# EAGLE board CT_schematic (EAGLE 7.6.0)

Size 100 x 80 mm. Coordinates in mm from the lower left corner, seen from the top.
Outline: 0,0 100,0 100,80 0,80 0,0
Copper layers (1*16): Top 0.035mm / dielectric 1.5mm / Bottom 0.035mm
Design rules "default": minimum track width 10mil, minimum drill 24mil, track to track 8mil, track to pad 8mil, pad to pad 8mil, via to via 8mil, smd to smd 8mil, copper to edge 40mil, drill to drill 8mil, minimum pad ring 10mil, minimum via ring 8mil, stop-mask expansion 4mil, vias tented up to drill 0mil, thermal gap 10mil

## Footprints (pad centres in the part's own frame; a part is rotated, then mirrored left to right if it is on the bottom)
C0603 = smd 0.8 x 0.8: 1 -0.762,0; 2 0.762,0
C0805 = smd 1.2 x 1.3: 1 -1.016,0; 2 1.016,0
C0402 = smd 0.5 x 0.5: 1 -0.508,0; 2 0.508,0
C1210 = smd 1.2 x 2.5: 1 -1.524,0; 2 1.524,0
EXV-9H = smd 3.505 x 1.676: 1 -2.857,0; 2 2.857,0
L0603 = smd 0.8 x 0.8: 1 -0.762,0; 2 0.762,0
L1210 = smd 1.2 x 2.5: 1 -1.524,0; 2 1.524,0
PJ-037B_PACKAGE = drill 3.7 square: 1 12,0 | drill 3.2 square: 2 6,0
R0603 = smd 0.8 x 0.8: 1 -0.762,0; 2 0.762,0
UFQFPN28 = smd 0.559 x 0.305: 1 -2.07,1.5; 7 -2.07,-1.5; 15 2.07,-1.5; 21 2.07,1.5 | smd 0.813 x 0.305: 2 -1.943,1; 3 -1.943,0.5; 4 -1.943,0; 5 -1.943,-0.5; 6 -1.943,-1; 16 1.943,-1; 17 1.943,-0.5; 18 1.943,0; 19 1.943,0.5; 20 1.943,1 | smd 0.305 x 0.559: 8 -1.5,-2.07; 14 1.5,-2.07; 22 1.5,2.07; 28 -1.5,2.07 | smd 0.305 x 0.813: 9 -1,-1.943; 10 -0.5,-1.943; 11 0,-1.943; 12 0.5,-1.943; 13 1,-1.943; 23 1,1.943; 24 0.5,1.943; 25 0,1.943; 26 -0.5,1.943; 27 -1,1.943
SSOP-20 = smd 1.651 x 0.432: 1 -3.48,2.925; 2 -3.48,2.275; 3 -3.48,1.625; 4 -3.48,0.975; 5 -3.48,0.325; 6 -3.48,-0.325; 7 -3.48,-0.975; 8 -3.48,-1.625; 9 -3.48,-2.275; 10 -3.48,-2.925; 11 3.48,-2.925; 12 3.48,-2.275; 13 3.48,-1.625; 14 3.48,-0.975; 15 3.48,-0.325; 16 3.48,0.325; 17 3.48,0.975; 18 3.48,1.625; 19 3.48,2.275; 20 3.48,2.925
182-009-MALE = drill 1.194 pad 1.524 octagon: 1 -5.537,10.923; 2 -2.769,10.923; 3 0,10.923; 4 2.769,10.923; 5 5.537,10.923; 6 -4.153,8.08; 7 -1.384,8.08; 8 1.384,8.08; 9 4.153,8.08 | hole 3.048: -12.446,9.501; 12.446,9.501
SSOP-28 = smd 1.5 x 0.4: 1 -3.625,4.225; 2 -3.625,3.575; 3 -3.625,2.925; 4 -3.625,2.275; 5 -3.625,1.625; 6 -3.625,0.975; 7 -3.625,0.325; 8 -3.625,-0.325; 9 -3.625,-0.975; 10 -3.625,-1.625; 11 -3.625,-2.275; 12 -3.625,-2.925; 13 -3.625,-3.575; 14 -3.625,-4.225; 15 3.625,-4.225; 16 3.625,-3.575; 17 3.625,-2.925; 18 3.625,-2.275; 19 3.625,-1.625; 20 3.625,-0.975; 21 3.625,-0.325; 22 3.625,0.325; 23 3.625,0.975; 24 3.625,1.625; 25 3.625,2.275; 26 3.625,2.925; 27 3.625,3.575; 28 3.625,4.225
VQFN-16 = smd 1.105 x 0.381: 1 -1.822,0.975; 2 -1.822,0.325; 3 -1.822,-0.325; 4 -1.822,-0.975; 9 1.822,-0.975; 10 1.822,-0.325; 11 1.822,0.325; 12 1.822,0.975 | smd 0.381 x 1.105: 5 -0.975,-1.822; 6 -0.325,-1.822; 7 0.325,-1.822; 8 0.975,-1.822; 13 0.975,1.822; 14 0.325,1.822; 15 -0.325,1.822; 16 -0.975,1.822
HTSS-105-01-G-D = drill 1 pad 1.8 square: 1 0,0 | drill 1 pad 1.8: 2 0,2.54; 3 2.54,0; 4 2.54,2.54; 5 5.08,0; 6 5.08,2.54; 7 7.62,0; 8 7.62,2.54; 9 10.16,0; 10 10.16,2.54
ASFL1 = smd 1.7 x 1.5: 1 -1.27,-1.1; 2 1.27,-1.1; 3 1.27,1.1; 4 -1.27,1.1
WSON-8 = smd 0.3 x 0.6: 1 -0.75,0; 2 0.05,0; 3 0.85,0; 4 1.65,0; 5 1.65,3.8; 6 0.85,3.8; 7 0.05,3.8; 8 -0.75,3.8 | smd 3 x 2.6: PAD 0.45,1.9
SON-6 = smd 0.55 x 0.3: 1 -0.355,0.5 | smd 0.52 x 0.3: 2 -0.37,0; 3 -0.37,-0.5; 4 0.37,-0.5; 5 0.37,0; 6 0.37,0.5
SW_4-1437565-2 = smd 1.4 x 2.1: 1 -2.23,4.55; 2 -2.23,-4.55; 3 2.23,4.55; 4 2.23,-4.55
LGM67K-G1J2-24-Z = smd 0.8 x 1.4: A -2,0; C 0,0
NC7SZ125M5X = smd 1.3 x 0.7: 1 -1.3,0.95; 2 -1.3,0; 3 -1.3,-0.95; 4 1.3,-0.95; 5 1.3,0.95

## Placement (x,y rotation side)
C1  1e-07  [C0603]  -19.05,82.55 0 top  (outside the outline)
C2  1e-07  [C0603]  -22.86,82.55 0 top  (outside the outline)
C3  4.7e-06  [C0603]  -74.93,77.47 0 top  (outside the outline)
C4  1e-07  [C0603]  -26.67,82.55 0 top  (outside the outline)
C5  4.7e-06  [C0603]  -15.24,82.55 0 top  (outside the outline)
C6  1e-08  [C0603]  -30.48,82.55 0 top  (outside the outline)
C7  1e-08  [C0603]  -34.29,82.55 0 top  (outside the outline)
C8  1e-06  [C0603]  -38.1,82.55 0 top  (outside the outline)
C9  1e-06  [C0603]  -41.91,82.55 0 top  (outside the outline)
C10  1e-06  [C0603]  -45.72,82.55 0 top  (outside the outline)
C11  1e-06  [C0603]  -49.53,82.55 0 top  (outside the outline)
C12  4.7e-06  [C0805]  -76.2,69.85 0 top  (outside the outline)
C13  1e-07  [C0402]  -19.05,87.63 0 top  (outside the outline)
C14  1e-07  [C0402]  -22.86,87.63 0 top  (outside the outline)
C15  1e-07  [C0402]  -26.67,87.63 0 top  (outside the outline)
C16  1e-07  [C0402]  -30.48,87.63 0 top  (outside the outline)
C17  1e-07  [C0402]  -34.29,87.63 0 top  (outside the outline)
C18  1e-07  [C0402]  -38.1,87.63 0 top  (outside the outline)
C19  1e-07  [C0402]  -41.91,87.63 0 top  (outside the outline)
C20  1e-06  [C0603]  -53.34,82.55 0 top  (outside the outline)
C21  1e-08  [C0402]  -45.72,87.63 0 top  (outside the outline)
C22  1e-08  [C0402]  -49.53,87.63 0 top  (outside the outline)
C23  1e-05  [C1210]  -29.21,71.12 0 top  (outside the outline)
C24  1e-05  [C1210]  -35.56,71.12 0 top  (outside the outline)
C25  1e-07  [C0402]  -53.34,87.63 0 top  (outside the outline)
C26  0.0001  [EXV-9H]  -55.88,62.23 0 top  (outside the outline)
C27  0.0001  [EXV-9H]  -67.31,62.23 0 top  (outside the outline)
C28  1e-08  [C0402]  -57.15,87.63 0 top  (outside the outline)
F1  240.0  [L0603]  -57.15,82.55 0 top  (outside the outline)
I1  1.5e-05  [L1210]  -41.91,71.12 0 top  (outside the outline)
J1  PJ-037B  [PJ-037B_PACKAGE]  -27.94,50.8 0 top  (outside the outline)
R1  10000.0  [R0603]  -50.8,77.47 0 top  (outside the outline)
R2  1000.0  [R0603]  -60.96,82.55 0 top  (outside the outline)
R3  1600.5  [R0603]  -64.77,82.55 0 top  (outside the outline)
R4  4700.0  [R0603]  -68.58,82.55 0 top  (outside the outline)
R5  100000.0  [R0603]  -15.24,77.47 0 top  (outside the outline)
R6  100000.0  [R0603]  -20.32,77.47 0 top  (outside the outline)
R7  100000.0  [R0603]  -25.4,77.47 0 top  (outside the outline)
R8  100000.0  [R0603]  -30.48,77.47 0 top  (outside the outline)
R9  10000.0  [R0603]  -55.88,77.47 0 top  (outside the outline)
R10  10000.0  [R0603]  -60.96,77.47 0 top  (outside the outline)
R11  100000.0  [R0603]  -35.56,77.47 0 top  (outside the outline)
R12  2231.0  [R0603]  -72.39,82.55 0 top  (outside the outline)
R13  1000.0  [R0603]  -76.2,82.55 0 top  (outside the outline)
R14  10000.0  [R0603]  -66.04,77.47 0 top  (outside the outline)
R15  10000.0  [R0603]  -71.12,77.47 0 top  (outside the outline)
R16  9100.0  [R0603]  -15.24,87.63 0 top  (outside the outline)
R17  680000.0  [R0603]  -40.64,77.47 0 top  (outside the outline)
R18  120000.0  [R0603]  -45.72,77.47 0 top  (outside the outline)
U1  stm32f042g6u6  [UFQFPN28]  -55.88,71.12 0 top  (outside the outline)
U2  MAX3218EAP+T  [SSOP-20]  -72.39,48.26 0 top  (outside the outline)
U3  182-009-113R531  [182-009-MALE]  -36.83,6.35 0 top  (outside the outline)
U4  ST3241EBPR  [SSOP-28]  -58.42,30.48 0 top  (outside the outline)
U5  182-009-113R531  [182-009-MALE]  -36.83,27.94 0 top  (outside the outline)
U6  TSC2046IRGVR  [VQFN-16]  -63.5,69.85 0 top  (outside the outline)
U7  HTSS-105-01-G-D  [HTSS-105-01-G-D]  -63.5,48.26 0 top  (outside the outline)
U8  ASFL1-25MHZ-NCS  [ASFL1]  -46.99,62.23 0 top  (outside the outline)
U9  LP3878SDX-ADJ/NOPB  [WSON-8]  -30.48,60.96 0 top  (outside the outline)
U10  TPS3895ADRYR  [SON-6]  -59.69,86.36 0 top  (outside the outline)
U11  4-1437565-2  [SW_4-1437565-2]  -44.45,49.53 0 top  (outside the outline)
U12  Q65110A2395  [LGM67K-G1J2-24-Z]  -17.78,71.12 0 top  (outside the outline)
U13  nc7sz125m5x  [NC7SZ125M5X]  -69.85,69.85 0 top  (outside the outline)

## Library data of the parts
C1-C28 F1 I1 J1 R1-R18 U1-U13 = circuit_tree

## Nets
CLK_U1_2: U1.2 U8.3
GND: C1.2 C2.2 C3.2 C4.2 C5.2 C6.2 C7.2 C8.2 C9.2 C10.2 C11.2 C13.2 C16.2 C17.2 C18.2 C19.2 C20.2 C21.2 C22.2 C23.2 C24.2 C25.2 C26.2 C27.2 C28.2 J1.2 R2.2 R13.2 R16.2 R18.2 U1.16 U2.5 U2.17 U2.20 U3.5 U4.23 U4.25 U5.5 U6.10 U7.9 U8.2 U9.3 U9.PAD U10.2 U12.C U13.1 U13.3
NET_U1_4: R4.1 U1.4 U13.4
NET_U1_5: C6.1 C7.1 C8.1 F1.1 U1.5
NET_U1_27: R3.1 U1.27 U12.A
NET_U1_28: R1.1 U1.28 U11.3 U11.4
NET_U2_1: I1.1 U2.1
NET_U2_2: R5.1 U2.2
NET_U2_3: R6.1 U2.3
NET_U2_4: R7.1 U2.4
NET_U2_15: C11.1 U2.15
NET_U2_16: C12.2 U2.16
NET_U2_18: C12.1 U2.18
NET_U2_19: C10.1 U2.19
NET_U3_2: U2.12 U3.2
NET_U3_3: U2.14 U3.3
NET_U3_7: U2.11 U3.7
NET_U3_8: U2.13 U3.8
NET_U4_1: C15.1 U4.1
NET_U4_2: C15.2 U4.2
NET_U4_3: C17.1 U4.3
NET_U4_22: R8.1 U4.22
NET_U4_24: C14.2 U4.24
NET_U4_27: C16.1 U4.27
NET_U4_28: C14.1 U4.28
NET_U5_2: U4.4 U5.2
NET_U5_3: U4.9 U5.3
NET_U5_7: U4.5 U5.7
NET_U5_8: U4.10 U5.8
NET_U6_15: R10.1 U6.15
NET_U7_3: U6.7 U7.3
NET_U7_4: U6.9 U7.4
NET_U7_5: U6.6 U7.5
NET_U7_6: U6.8 U7.6
NET_U9_1: C22.1 U9.1
NET_U9_6: R12.2 R13.1 U9.6
NET_U9_8: R11.1 U9.8
NET_U10_1: R15.1 R16.1 U10.1
NET_U10_3: R17.2 R18.1 U10.3
NET_U10_4: R14.1 U10.4 U13.2
NET_U11_1: R2.1 U11.1 U11.2
PROC_SPI1_MISO: U1.12 U6.16
PROC_SPI1_MOSI: U1.13 U6.2
PROC_SPI1_NSS: R9.1 U1.10 U6.3
PROC_SPI1_SCK: U1.11 U6.4
PROC_USART1_RX: U1.20 U4.19
PROC_USART1_TX: U1.19 U4.14
PROC_USART2_CTS: U1.6 U2.8
PROC_USART2_RTS: U1.7 U2.10
PROC_USART2_RX: U1.9 U2.9
PROC_USART2_TX: U1.8 U2.7
VCC_S1_14V8: C23.1 C26.1 C27.1 J1.1 R11.2 U9.4
VCC_TIER1_3V3: C1.1 C2.1 C3.1 C4.1 C5.1 C9.1 C13.1 C18.1 C19.1 C20.1 C21.1 C24.1 C25.1 C28.1 F1.2 I1.2 R1.2 R3.2 R4.2 R5.2 R6.2 R7.2 R8.2 R9.2 R10.2 R12.1 R14.2 R15.2 R17.1 U1.17 U1.18 U2.6 U4.26 U6.5 U6.14 U8.4 U9.5 U10.6 U13.5

## Tracks (layer width: path | path; a pad name or v marks a point on that pad's centre or on a via)
CLK_U1_2  (1 unrouted)
GND  (46 unrouted)
NET_U1_4  (2 unrouted)
NET_U1_5  (4 unrouted)
NET_U1_27  (2 unrouted)
NET_U1_28  (3 unrouted)
NET_U2_1  (1 unrouted)
NET_U2_2  (1 unrouted)
NET_U2_3  (1 unrouted)
NET_U2_4  (1 unrouted)
NET_U2_15  (1 unrouted)
NET_U2_16  (1 unrouted)
NET_U2_18  (1 unrouted)
NET_U2_19  (1 unrouted)
NET_U3_2  (1 unrouted)
NET_U3_3  (1 unrouted)
NET_U3_7  (1 unrouted)
NET_U3_8  (1 unrouted)
NET_U4_1  (1 unrouted)
NET_U4_2  (1 unrouted)
NET_U4_3  (1 unrouted)
NET_U4_22  (1 unrouted)
NET_U4_24  (1 unrouted)
NET_U4_27  (1 unrouted)
NET_U4_28  (1 unrouted)
NET_U5_2  (1 unrouted)
NET_U5_3  (1 unrouted)
NET_U5_7  (1 unrouted)
NET_U5_8  (1 unrouted)
NET_U6_15  (1 unrouted)
NET_U7_3  (1 unrouted)
NET_U7_4  (1 unrouted)
NET_U7_5  (1 unrouted)
NET_U7_6  (1 unrouted)
NET_U9_1  (1 unrouted)
NET_U9_6  (2 unrouted)
NET_U9_8  (1 unrouted)
NET_U10_1  (2 unrouted)
NET_U10_3  (2 unrouted)
NET_U10_4  (2 unrouted)
NET_U11_1  (2 unrouted)
PROC_SPI1_MISO  (1 unrouted)
PROC_SPI1_MOSI  (1 unrouted)
PROC_SPI1_NSS  (2 unrouted)
PROC_SPI1_SCK  (1 unrouted)
PROC_USART1_RX  (1 unrouted)
PROC_USART1_TX  (1 unrouted)
PROC_USART2_CTS  (1 unrouted)
PROC_USART2_RTS  (1 unrouted)
PROC_USART2_RX  (1 unrouted)
PROC_USART2_TX  (1 unrouted)
VCC_S1_14V8  (5 unrouted)
VCC_TIER1_3V3  (38 unrouted)